# Altium PCB XC7AXXXT.PcbDoc (part 2 of 2)
Units mil, origin at the board's own origin, x right, y up, seen from the top; angles counter-clockwise.
Board outline 2381.89 x 2066.93 mil, 4 copper layers (Top Layer, SIG1, SIG2, Bottom Layer); 188 components, 308 nets, 1233 pads, 145 vias.
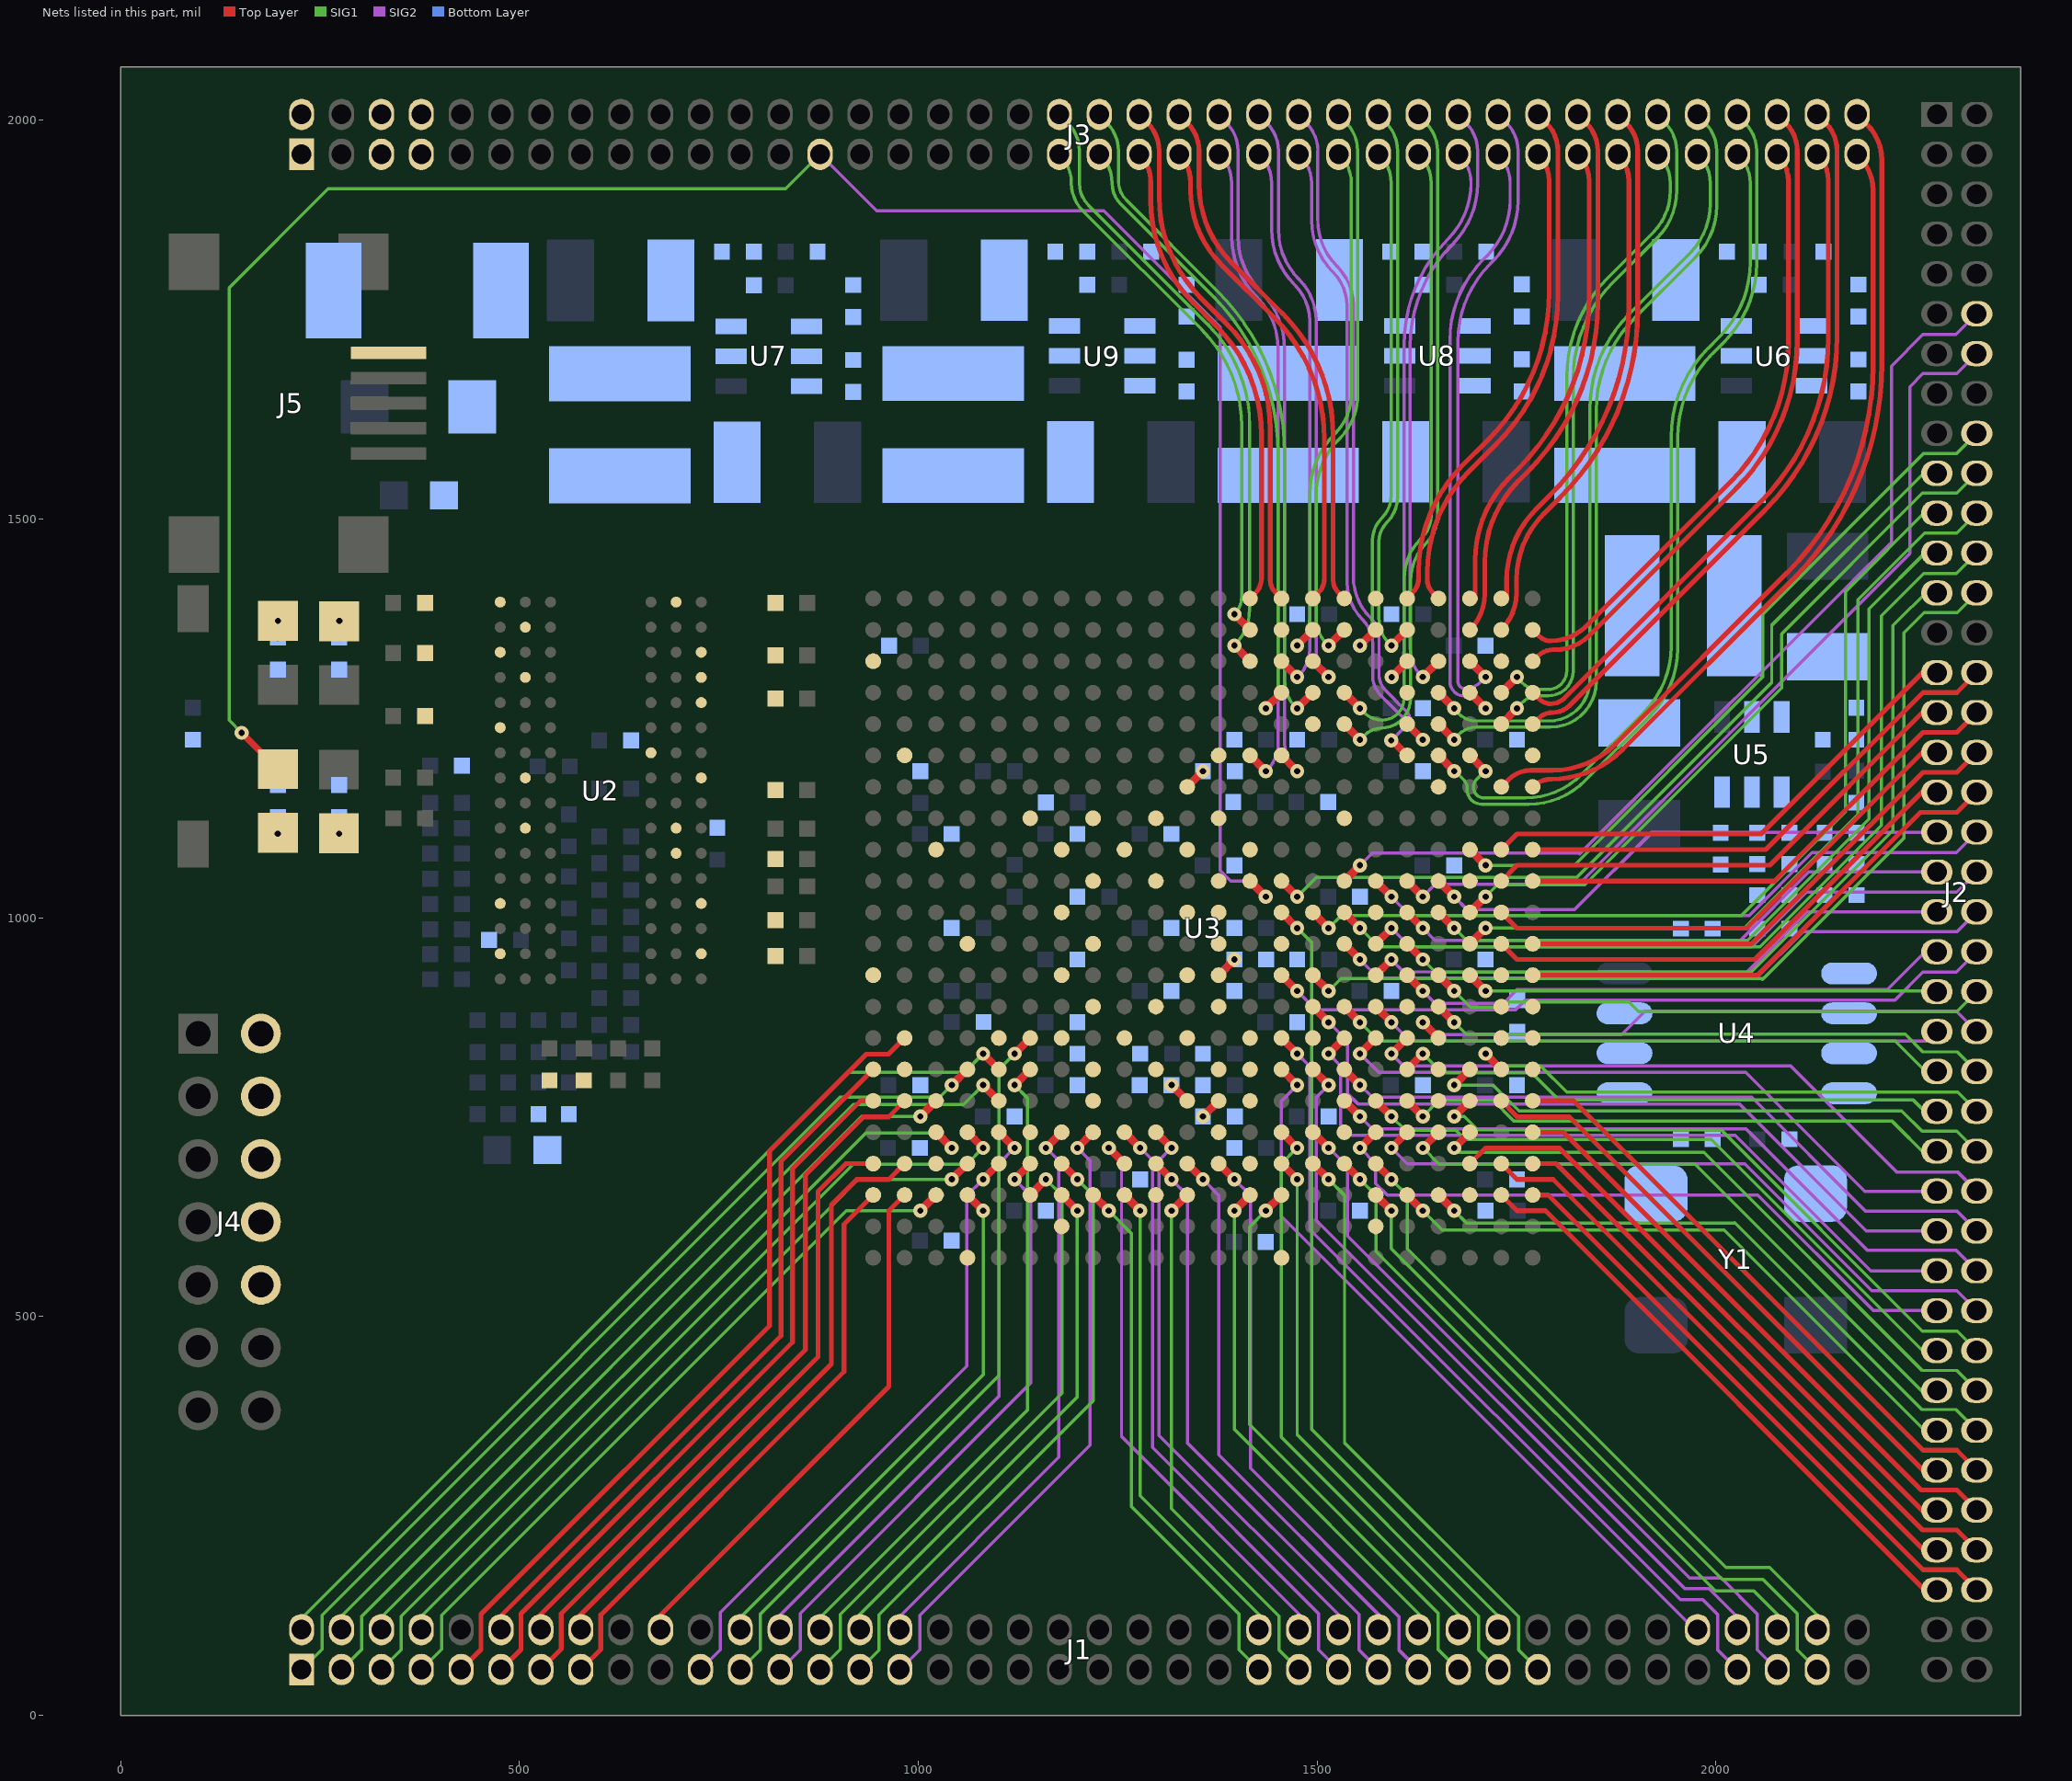
[diagram p4: the nets of this part, all layers, seen from the top]

## Via types
v1: diameter 17.72, hole 7.87, Top Layer to Bottom Layer, tented both sides, 145 vias

## Nets (pads, with @x,y where several pads share a name; then routed paths per layer and width w, separated by ;. In a path a pad name is that pad's centre, name@x,y a point inside that pad or via, vN(x,y) a via of type N, cw(c..) or ccw(c..) an arc to the next point about the centre after c; other vN are vias at no path point) (continued)
J20: J2.18 U3.J20 | length 913.9
  Top Layer w10: U3.J20@1691.5,1085.59 v1(1711.19,1065.9)
  SIG1 w4: v1(1711.19,1065.9) 1822.29,1065.9 2058.39,1302 2058.39,1380.5 2259.89,1582 2301.39,1582 J2.18@2326.89,1607.5
J21: J2.29 U3.J21 | length 630.9
  Top Layer w6: U3.J21@1730.87,1085.59 1750.65,1105.37 2056.76,1105.37 J2.29@2266.64,1315.25
J22: J2.30 U3.J22 | length 648.6
  Top Layer w6: U3.J22@1770.24,1085.59 2062.48,1085.59 2259.39,1282.5 2301.89,1282.5 J2.30@2326.89,1307.5
K13: J3.27 U3.K13 V1.2 | length 2810.3
  Top Layer w8: v1(151.69,1232) V1.2@197.19,1186.5
  Top Layer w10: U3.K13@1415.91,1046.22 v1(1435.6,1026.53)
  SIG2 w4: J3.27@876.89,1957.5 947.79,1886.6 1232.4,1886.6 1378.39,1740.61 1378.39,1059.5 1391.89,1046 1416.13,1046 v1(1435.6,1026.53)
  SIG1 w4: v1(151.69,1232) 136,1247.69 136,1790.1 260.1,1914.2 833.59,1914.2 J3.27@876.89,1957.5
K14: J2.19 U3.K14 | length 1084.9
  Top Layer w10: U3.K14@1455.28,1046.22 v1(1474.97,1026.53)
  SIG1 w4: v1(1474.97,1026.53) 1498.93,1050.5 1825.39,1050.5 2069.89,1295 2069.89,1367 J2.19@2267.14,1564.25
K16: J2.12 U3.K16 | length 1217.4
  Top Layer w10: U3.K16@1534.02,1046.22 v1(1553.71,1065.91)
  SIG2 w4: v1(1553.71,1065.91) 1569.21,1081.41 1829.3,1081.41 ; 1829.3,1080.41 2219.89,1471 2219.89,1692 2259.39,1731.5 2300.89,1731.5 J2.12@2326.89,1757.5
K17: J2.38 U3.K17 | length 815
  Top Layer w10: U3.K17@1573.39,1046.22 v1(1593.08,1026.53)
  SIG2 w4: v1(1593.08,1026.53) 1616.94,1002.67 2041.17,1002.67 2120.5,1082 2301.39,1082 J2.38@2326.89,1107.5
K18: J2.14 U3.K18 | length 1126.8
  Top Layer w10: U3.K18@1612.76,1046.22 v1(1632.45,1026.53)
  SIG2 w4: v1(1632.45,1026.53) 1647.95,1042.04 1828.04,1042.04 2242.89,1456.89 2242.89,1666 2259.39,1682.5 2301.89,1682.5 J2.14@2326.89,1707.5
K19: J2.37 U3.K19 | length 679.4
  Top Layer w10: U3.K19@1652.13,1046.22 v1(1671.82,1026.53)
  SIG2 w4: v1(1671.82,1026.53) 1687.68,1010.67 1823.06,1010.67 1919.39,1107 ; 1919.39,1107.5 J2.37@2276.89,1107.5
K21: J2.31 U3.K21 | length 628.3
  Top Layer w6: U3.K21@1730.87,1046.22 1750.65,1066 2067.39,1066 J2.31@2267.89,1266.5
K22: J2.32 U3.K22 | length 644.2
  Top Layer w6: U3.K22@1770.24,1046.22 2073.11,1046.22 2259.39,1232.5 2301.89,1232.5 J2.32@2326.89,1257.5
L1_N: J3.48 U3.F14 | length 879
  Top Layer w10: U3.F14@1455.28,1203.7 v1(1474.97,1184.01)
  SIG2 w4: J3.48@1376.89,2007.5 J3.48@1387.07,1997.32 ; J3.48@1386.07,1997.32 cw(c1350.31,1961.55) 1400.89,1961.55 1400.89,1853.94 ccw(c1497.3,1853.94) 1429.13,1785.76 cw(c1356.33,1712.97) 1459.28,1712.97 1459.28,1219.47 ccw(c1509.42,1219.47) v1@1473.97,1184.01
L1_P: J3.47 U3.F13 | length 824.9
  Top Layer w10: U3.F13@1415.91,1203.7 v1(1435.6,1184.01)
  SIG2 w4: J3.47@1377.89,1957.5 cw(c1341.68,1921.29) 1392.89,1921.29 1392.89,1853.97 ccw(c1499.38,1853.97) 1424.08,1778.67 cw(c1358.41,1713) 1451.28,1713 1451.28,1219.47 cw(c1401.14,1219.47) v1@1436.6,1184.01
L3_N: J3.50 U3.C15 | length 758
  Top Layer w10: U3.C15@1494.65,1321.81 v1(1514.34,1302.12)
  SIG2 w4: J3.50@1426.89,2007.5 J3.50@1437.07,1997.32 ; J3.50@1436.58,1997.31 cw(c1400.81,1961.55) 1451.39,1961.55 1451.39,1863.24 ccw(c1540.09,1863.24) 1477.37,1800.52 cw(c1426,1749.14) 1498.65,1749.14 1498.65,1337.58 ccw(c1548.79,1337.58) v1@1513.34,1302.12
L3_P: J3.49 U3.C14 | length 703.9
  Top Layer w10: U3.C14@1455.28,1321.81 v1(1474.97,1302.12)
  SIG2 w4: J3.49@1427.89,1957.5 cw(c1391.68,1921.29) 1442.89,1921.29 1442.89,1863.61 ccw(c1541.28,1863.61) 1471.71,1794.04 cw(c1425.98,1748.31) 1490.65,1748.31 1490.65,1337.58 cw(c1440.51,1337.58) v1@1475.97,1302.12
L5_N: J3.57 U3.D16 | length 798
  Top Layer w10: U3.D16@1534.02,1282.44 v1(1553.71,1262.75)
  SIG1 w4: v1(1553.71,1262.75) 1559.58,1256.88 ccw(c1580.86,1278.17) 1580.86,1248.07 ; 1581.86,1248.07 ccw(c1581.86,1275.1) 1608.89,1275.1 1608.89,1425 cw(c1679.24,1425) 1629.5,1474.75 1631.28,1476.53 ccw(c1603.23,1504.57) 1642.89,1504.57 1642.89,1921.29 ccw(c1591.68,1921.29) J3.57@1627.89,1957.5
L5_P: J3.58 U3.E16 | length 867.8
  Top Layer w10: U3.E16@1534.02,1243.07 v1(1553.71,1223.38)
  SIG1 w4: v1(1553.71,1223.38) 1559.25,1228.93 cw(c1581.32,1206.87) 1581.32,1238.07 ; 1580.32,1238.07 ccw(c1580.32,1274.64) 1616.89,1274.64 1616.89,1421.89 cw(c1684.75,1421.89) 1636.77,1469.88 ccw(c1602.67,1503.97) 1650.89,1503.97 1650.89,1961.55 ccw(c1600.31,1961.55) J3.58@1636.07,1997.32 ; J3.58@1626.89,2007.5 J3.58@1637.07,1997.32
L6_N: J3.42 U3.D15 | length 857.2
  Top Layer w10: v1(1474.96,1262.75) U3.D15@1494.65,1282.44
  SIG1 w4: J3.42@1226.89,2007.5 J3.42@1237.07,1997.32 ; J3.42@1236.07,1997.32 cw(c1200.31,1961.55) 1250.89,1961.55 1250.89,1923.83 ccw(c1284.29,1923.83) 1260.67,1900.22 1375.03,1785.86 cw(c1171.64,1582.47) 1459.28,1582.47 1459.28,1298.21 ccw(c1509.42,1298.21) v1@1473.96,1262.75
L6_P: J3.41 U3.D14 | length 803.2
  Top Layer w10: v1(1435.59,1262.75) U3.D14@1455.28,1282.44
  SIG1 w4: J3.41@1227.89,1957.5 cw(c1191.68,1921.29) 1242.89,1921.29 ccw(c1280.14,1921.29) 1253.8,1894.95 1369.44,1779.31 cw(c1171.85,1581.73) 1451.28,1581.73 1451.28,1298.21 cw(c1401.14,1298.21) v1@1436.59,1262.75
L7_N: J3.54 U3.B16 | length 719.9
  Top Layer w10: v1(1514.33,1341.49) U3.B16@1534.02,1361.18
  SIG1 w4: v1@1513.33,1341.49 cw(c1548.79,1376.95) 1498.65,1376.95 1498.65,1530.09 cw(c1598.65,1530.09) 1527.94,1600.8 ; J3.54@1526.89,2007.5 J3.54@1537.07,1997.32 ; 1528.04,1600.8 ccw(c1472.63,1656.21) 1550.99,1656.21 1550.99,1961.55 ; J3.54@1536.07,1997.32 cw(c1500.31,1961.55) 1550.89,1961.55
L7_P: J3.53 U3.B15 | length 665.9
  Top Layer w10: v1(1474.96,1341.49) U3.B15@1494.65,1361.18
  SIG1 w4: v1@1475.96,1341.49 ccw(c1440.51,1376.95) 1490.65,1376.95 1490.65,1531 cw(c1598.44,1531) 1522.22,1607.22 1523.46,1608.46 ccw(c1476.56,1655.37) 1542.89,1655.37 1542.89,1921.29 ccw(c1491.68,1921.29) J3.53@1527.89,1957.5
L8_N: J3.39 U3.B13 | length 690
  Top Layer w10: v1(1396.22,1380.87) U3.B13@1415.91,1361.18
  SIG1 w4: J3.39@1176.89,1957.5 cw(c1140.68,1921.29) 1191.89,1921.29 ccw(c1240.87,1921.29) 1206.23,1886.66 1355.16,1737.73 cw(c1233.49,1616.06) 1405.56,1616.06 1405.56,1403.4 cw(c1373.69,1403.4) v1(1396.22,1380.87)
L8_P: J3.40 U3.C13 | length 786.2
  Top Layer w10: v1(1396.22,1341.5) U3.C13@1415.91,1321.81
  SIG1 w4: J3.40@1176.89,2007.5 1187.07,1997.32 cw(c1151.31,1961.55) 1201.89,1961.55 1201.89,1921.09 ccw(c1240.38,1921.09) 1213.16,1893.87 1362.49,1744.54 cw(c1234.38,1616.43) 1415.56,1616.43 1415.56,1388.17 cw(c1349.55,1388.17) v1(1396.22,1341.5)
L9_N: J3.46 U3.A16 | length 674.1
  Top Layer w6: J3.46@1326.89,2007.5 1337.07,1997.32 cw(c1301.31,1961.55) 1351.89,1961.55 1351.89,1920.26 ccw(c1491.2,1920.26) 1392.69,1821.75 1456.3,1758.15 ; 1456.41,1758.03 cw(c1302.31,1604.16) 1520.08,1604.16 1520.08,1423.2 ccw(c1541.1,1423.2) 1526.24,1408.33 U3.A16@1534.02,1400.55
L9_P: J3.45 U3.A15 | length 620.1
  Top Layer w6: J3.45@1326.89,1957.5 cw(c1291.88,1922.49) 1341.39,1922.49 1341.39,1912.93 ccw(c1475.22,1912.93) 1380.59,1818.3 1445.86,1753.03 cw(c1293.23,1600.4) 1509.08,1600.4 1509.08,1426.2 cw(c1482,1426.2) 1501.15,1407.05 U3.A15@1494.65,1400.55
L10_N: J3.44 U3.A14 | length 661.9
  Top Layer w6: J3.44@1276.89,2007.5 1287.07,1997.32 cw(c1251.31,1961.55) 1301.89,1961.55 1301.89,1904.04 ccw(c1481.7,1904.04) 1354.56,1776.89 1386.23,1745.22 cw(c1253.17,1612.16) 1441.34,1612.16 1441.34,1423.2 ccw(c1462.36,1423.2) 1447.5,1408.33 U3.A14@1455.28,1400.55
L10_P: J3.43 U3.A13 | length 607.1
  Top Layer w6: J3.43@1276.89,1957.5 cw(c1241.88,1922.49) 1291.39,1922.49 1291.39,1899.61 ccw(c1472.73,1899.61) 1344.5,1771.39 1373.7,1742.19 cw(c1236.94,1605.44) 1430.34,1605.44 1430.34,1426.2 cw(c1403.26,1426.2) 1422.41,1407.05 U3.A13@1415.91,1400.55
L11_N: J3.56 U3.B18 | length 712.2
  Top Layer w10: v1(1593.07,1341.49) U3.B18@1612.76,1361.18
  SIG1 w4: J3.56@1576.89,2007.5 J3.56@1587.07,1997.32 ; J3.56@1586.07,1997.32 cw(c1550.31,1961.55) 1600.89,1961.55 1600.89,1528.72 cw(c1553.28,1528.72) 1586.94,1495.06 ccw(c1610.01,1471.99) 1577.39,1471.99 1577.39,1458 1577.39,1376.95 ccw(c1627.53,1376.95) v1@1592.07,1341.49
L11_P: J3.55 U3.B17 | length 658.1
  Top Layer w10: v1(1553.7,1341.49) U3.B17@1573.39,1361.18
  SIG1 w4: v1@1554.7,1341.49 ccw(c1519.25,1376.95) 1569.39,1376.95 1569.39,1465 1569.39,1473.4 cw(c1608.6,1473.4) 1580.87,1501.13 ccw(c1551.87,1530.14) 1592.89,1530.14 1592.89,1921.29 ccw(c1541.68,1921.29) J3.55@1577.89,1957.5
L13_N: J3.60 U3.C19 | length 768
  Top Layer w10: v1(1632.44,1302.12) U3.C19@1652.13,1321.81
  SIG2 w4: v1@1631.44,1302 cw(c1666.9,1337.45) 1616.76,1337.45 1616.76,1716.98 cw(c1797.57,1716.98) 1669.72,1844.83 ccw(c1593.93,1920.61) 1701.11,1920.61 1701.11,1961.55 ccw(c1650.53,1961.55) J3.60@1686.29,1997.32 ; J3.60@1676.89,2007.5 J3.60@1687.07,1997.32
L13_P: J3.59 U3.C18 | length 714.3
  Top Layer w10: v1(1593.39,1302) 1593.2,1302 1593.07,1302.12 U3.C18@1612.76,1321.81
  SIG2 w4: v1@1593.2,1302.19 v1(1593.39,1302) ; v1@1594.39,1302 ccw(c1559.7,1336.69) 1608.76,1336.69 1608.76,1718.18 cw(c1796.66,1718.18) 1663.8,1851.05 ccw(c1593.56,1921.29) 1692.89,1921.29 ccw(c1641.68,1921.29) J3.59@1677.89,1957.5
L14: J1.62 U3.L14 | length 1005.7
  Top Layer w10: U3.L14@1455.28,1006.85 v1(1474.97,987.16)
  SIG1 w4: v1(1474.97,987.16) 1493.39,968.74 1493.39,358.5 J1.62@1734.89,117
L14_N: J3.71 U3.D19 | length 946.7
  Top Layer w10: U3.D19@1652.13,1282.44 v1(1671.82,1262.75)
  SIG1 w4: v1@1671.82,1261.75 1677.69,1255.88 ccw(c1698.97,1277.17) 1698.97,1247.07 1790.98,1247.07 ccw(c1790.98,1297.98) 1841.89,1297.98 1841.89,1637.86 cw(c2011.23,1637.86) 1891.49,1757.6 1966.86,1832.97 ccw(c1904.01,1895.82) 1992.89,1895.82 1992.89,1921.29 ccw(c1941.68,1921.29) J3.71@1977.89,1957.5
L14_P: J3.72 U3.E19 | length 1014.2
  Top Layer w10: U3.E19@1652.13,1243.07 v1(1671.82,1223.38)
  SIG1 w4: v1@1671.82,1224.38 1677.36,1229.93 cw(c1699.43,1207.87) 1699.43,1239.07 1792.54,1239.07 ccw(c1792.54,1296.42) 1849.89,1296.42 1849.89,1636.6 cw(c2012.27,1636.6) 1897.45,1751.42 1973.69,1827.65 ccw(c1908.01,1893.33) 2000.89,1893.33 2000.89,1961.55 ccw(c1950.31,1961.55) J3.72@1986.07,1997.32 ; J3.72@1976.89,2007.5 J3.72@1987.07,1997.32
L15: J2.21 U3.L15 | length 1162.3
  Top Layer w10: U3.L15@1494.65,1006.85 v1(1514.34,987.16)
  SIG1 w4: v1(1514.34,987.16) 1529.84,1002.67 2031.67,1002.67 2162.39,1133.39 2162.39,1409 J2.21@2268.64,1515.25
L15_N: J3.52 U3.E18 | length 860.1
  Top Layer w10: U3.E18@1612.76,1243.07 v1(1632.45,1223.38)
  SIG2 w4: J3.52@1476.89,2007.5 J3.52@1487.07,1997.32 ; J3.52@1486.07,1997.32 cw(c1450.31,1961.55) 1500.89,1961.55 1500.89,1875.22 ccw(c1583.51,1875.22) 1525.09,1816.8 cw(c1476.08,1767.79) 1545.39,1767.79 1545.39,1427.58 ccw(c1616.8,1427.58) 1566.31,1377.08 cw(c1539.1,1349.88) 1577.57,1349.88 1577.57,1304.81 ccw(c1604.97,1304.81) 1585.6,1285.43 1610.8,1260.24 cw(c1594.13,1243.57) 1617.7,1243.57 ccw(c1633.25,1243.57) 1622.25,1232.58 v1@1631.44,1223.39
L15_P: J3.51 U3.F18 | length 808.9
  Top Layer w10: v1(1592.89,1222.5) 1592.89,1223.2 1593.07,1223.39 U3.F18@1612.76,1203.7
  SIG2 w4: J3.51@1477.89,1957.5 cw(c1441.68,1921.29) 1492.89,1921.29 1492.89,1874.75 ccw(c1584.38,1874.75) 1519.69,1810.06 cw(c1476.94,1767.32) 1537.39,1767.32 1537.39,1420.71 ccw(c1602.21,1420.71) 1556.37,1374.87 cw(c1524.51,1343.01) 1569.57,1343.01 1569.57,1303.77 ccw(c1604.47,1303.77) 1579.79,1279.09 1605.19,1253.7 cw(c1594.29,1242.81) 1609.7,1242.81 cw(c1600.52,1242.81) 1607.01,1236.32 v1@1593.89,1223.2 ; v1(1592.89,1222.5) v1@1592.89,1223.2
L16: J2.24 U3.L16 | length 1169.4
  Top Layer w10: U3.L16@1534.02,1006.85 v1(1553.71,987.16)
  SIG1 w4: v1(1553.71,987.16) 1577.2,963.67 2055.06,963.67 2207.39,1116 2207.39,1379 2260.39,1432 2301.39,1432 J2.24@2326.89,1457.5
L16_N: J3.65 U3.A20 | length 601.7
  Top Layer w6: U3.A20@1698.11,1399.16 1698.11,1448.24 cw(c1845.33,1448.24) 1741.23,1552.34 1751.4,1562.51 ccw(c1535.35,1778.56) 1840.89,1778.56 1840.89,1923.7 ccw(c1793.09,1923.7) J3.65@1826.89,1957.5
L16_P: J3.66 U3.B20 | length 753.9
  Top Layer w6: 1710.11,1411 1710.11,1406.11 ; J3.66@1826.89,2007.5 1837.07,1997.32 cw(c1801.31,1961.55) 1851.89,1961.55 1851.89,1771.65 cw(c1552.02,1771.65) 1764.06,1559.62 1752.52,1548.07 ccw(c1854.89,1445.7) 1710.11,1445.7 1710.11,1406.11 ; 1710.11,1406.11 cw(c1646.57,1406.11) U3.B20@1691.5,1361.18 ccw(c1646.57,1406.11) 1710.11,1406.11
L17_N: J3.64 U3.A19 | length 668.8
  Top Layer w6: U3.A19@1652.13,1400.55 1644.35,1408.33 cw(c1659.21,1423.2) 1638.19,1423.2 1638.19,1433.79 cw(c1816.73,1433.79) 1690.48,1560.04 1724.69,1594.24 ccw(c1538.3,1780.63) 1801.89,1780.63 1801.89,1961.55 ccw(c1751.31,1961.55) 1787.07,1997.32 J3.64@1776.89,2007.5
L17_P: J3.63 U3.A18 | length 614
  Top Layer w6: U3.A18@1612.76,1400.55 1619.26,1407.05 ccw(c1600.11,1426.2) 1627.19,1426.2 1627.19,1434.66 cw(c1814.63,1434.66) 1682.09,1567.2 1714.18,1599.29 ccw(c1528.99,1784.48) 1790.89,1784.48 1790.89,1923.7 ccw(c1743.09,1923.7) J3.63@1776.89,1957.5
L18: J2.39 U3.L18 | length 714.1
  Top Layer w10: U3.L18@1612.76,1006.85 v1(1632.45,987.16)
  SIG2 w4: v1(1632.45,987.16) 1647.81,971.8 2030.69,971.8 2116.39,1057.5 J2.39@2276.89,1057.5
L18_N: J3.73 U3.F20 | length 1056.2
  Top Layer w10: U3.F20@1691.5,1203.7 v1(1711.19,1184.01)
  SIG1 w4: v1@1710.19,1184.01 1700.39,1174.22 ccw(c1711,1163.62) 1696,1163.62 ccw(c1709.12,1163.62) 1709.12,1150.5 1761,1150.5 ccw(c1761,1250.5) 1831.71,1179.79 1909.77,1257.85 ; 1909.68,1257.85 ccw(c1827.09,1340.43) 1943.89,1340.43 1943.89,1602.98 cw(c2100.94,1602.98) 1989.89,1714.03 2003.93,1728.07 ccw(c1909.87,1822.13) 2042.89,1822.13 2042.89,1921.29 ccw(c1991.68,1921.29) J3.73@2027.89,1957.5
L18_P: J3.74 U3.F19 | length 1138.2
  Top Layer w10: U3.F19@1652.13,1203.7 v1(1671.82,1184.01)
  SIG1 w4: v1@1672.82,1184.01 1683.92,1172.92 cw(c1674.05,1163.05) 1688,1163.05 1688,1160.66 ccw(c1706.16,1160.66) 1706.16,1142.5 1765,1142.5 ccw(c1765,1242.5) 1835.71,1171.79 1916.65,1252.72 ccw(c1831.52,1337.85) 1951.91,1337.85 1951.89,1601.95 cw(c2101.43,1601.95) 1995.69,1707.69 2009.89,1721.89 ccw(c1910.9,1820.88) 2050.89,1820.88 2050.89,1961.55 ccw(c2000.31,1961.55) J3.74@2036.07,1997.32 ; J3.74@2026.89,2007.5 J3.74@2037.07,1997.32
L19: J2.23 U3.L19 | length 988.1
  Top Layer w10: U3.L19@1652.13,1006.85 v1(1671.82,987.16)
  SIG1 w4: v1(1671.82,987.16) 1687.31,971.67 2039.67,971.67 2191.89,1123.89 2191.89,1387.5 J2.23@2267.64,1463.25
L19_N: J3.62 U3.C20 | length 812.5
  Top Layer w10: U3.C20@1691.5,1321.81 v1(1711.19,1302.12)
  SIG2 w4: v1(1711.19,1302.12) 1704.36,1295.3 cw(c1685.53,1314.13) 1685.53,1287.5 cw(c1685.53,1296.64) 1676.39,1296.64 1676.39,1722.2 cw(c1814.72,1722.2) 1716.91,1820.02 1720.54,1823.65 ccw(c1644.87,1899.33) 1751.89,1899.33 1751.89,1961.55 ccw(c1701.31,1961.55) 1737.07,1997.32 J3.62@1726.89,2007.5
L19_P: J3.61 U3.D20 | length 774.1
  Top Layer w10: U3.D20@1691.5,1282.44 v1(1711.19,1262.75)
  SIG2 w4: v1(1711.19,1262.75) 1703.59,1270.35 ccw(c1685.12,1251.87) 1685.12,1278 cw(c1685.12,1296.73) 1666.39,1296.73 1666.39,1723.82 cw(c1810.81,1723.82) 1708.69,1825.94 1713.06,1830.31 ccw(c1643.45,1899.92) 1741.89,1899.92 1741.89,1921.29 ccw(c1690.68,1921.29) J3.61@1726.89,1957.5
L20: J2.20 U3.L20 | length 903
  Top Layer w10: U3.L20@1691.5,1006.85 v1(1711.19,1026.54)
  SIG1 w4: v1(1711.19,1026.54) 1726.15,1041.5 1835.39,1041.5 2082.39,1288.5 2082.39,1356 2258.89,1532.5 2301.89,1532.5 J2.20@2326.89,1557.5
L20_N: J3.75 U3.B22 | length 815.6
  Top Layer w6: U3.B22@1770.24,1361.18 1778.02,1353.4 ccw(c1792.89,1368.26) 1792.89,1347.24 ; J3.75@2076.89,1957.5 cw(c2043.09,1923.7) 2090.89,1923.7 2090.89,1722.13 cw(c1842.99,1722.13) 2018.28,1546.84 1836.92,1365.48 ; 1792.89,1347.24 ccw(c1792.89,1409.51) 1836.92,1365.48 ; 1792.89,1347.24 ccw(c1792.89,1409.51) 1836.92,1365.48
L20_P: J3.76 U3.C22 | length 838.7
  Top Layer w6: U3.C22@1770.24,1321.81 1776.74,1328.31 cw(c1795.89,1309.16) 1795.89,1336.24 1798.55,1336.24 ccw(c1798.55,1395.85) 1840.7,1353.7 2024.56,1537.56 ccw(c1837.85,1724.26) 2101.89,1724.26 2101.89,1961.55 ccw(c2051.31,1961.55) 2087.07,1997.32 J3.76@2076.89,2007.5
L21: J2.33 U3.L21 | length 637.1
  Top Layer w6: U3.L21@1730.87,1006.85 1750.65,987.07 2038.46,987.07 J2.33@2265.64,1214.25
L21_N: J3.67 U3.A21 | length 605.7
  Top Layer w6: U3.A21@1737.48,1399.16 1737.48,1423.07 cw(c1864.28,1423.07) 1774.62,1512.73 1792.17,1530.28 ccw(c1553.83,1768.62) 1890.89,1768.62 1890.89,1923.7 ccw(c1843.09,1923.7) J3.67@1876.89,1957.5
L21_P: J3.68 U3.B21 | length 703.3
  Top Layer w6: U3.B21@1730.87,1361.18 ccw(c1684.73,1407.32) 1749.98,1407.32 1749.98,1424.36 cw(c1866.29,1424.36) 1784.05,1506.6 1804.81,1527.36 ccw(c1570.43,1761.74) 1901.89,1761.74 1901.89,1961.55 ccw(c1851.31,1961.55) 1887.07,1997.32 J3.68@1876.89,2007.5
L22_N: J3.77 U3.D22 | length 855.6
  Top Layer w6: U3.D22@1770.24,1282.44 1778.02,1274.66 ccw(c1792.89,1289.52) 1792.89,1268.5 ccw(c1792.89,1292.51) 1809.86,1275.53 2055.51,1521.17 ccw(c1849.37,1727.31) 2140.89,1727.31 2140.89,1924.91 ccw(c2096.01,1924.91) J3.77@2127.74,1956.65
L22_P: J3.78 U3.E22 | length 928.4
  Top Layer w6: U3.E22@1770.24,1243.07 1776.74,1249.57 cw(c1795.89,1230.42) 1795.89,1257.5 ccw(c1795.89,1285.26) 1815.52,1265.63 2061.72,1511.83 ccw(c1844.04,1729.52) 2151.89,1729.52 2151.89,1961.55 ccw(c2101.31,1961.55) 2137.07,1997.32 J3.78@2126.89,2007.5
L23_N: J3.69 U3.D21 | length 803
  Top Layer w10: U3.D21@1730.87,1282.44 v1(1750.56,1302.13)
  SIG1 w4: v1@1750.56,1301.13 1756.43,1295.26 ccw(c1777.71,1316.54) 1777.71,1286.44 1789.5,1286.44 ccw(c1789.5,1309.83) 1812.89,1309.83 1812.89,1678 cw(c1989.2,1678) 1864.53,1802.67 1920.87,1859.02 ; 1920.77,1859.02 ccw(c1867.62,1912.17) 1942.79,1912.17 1942.79,1921.29 ccw(c1891.58,1921.29) J3.69@1927.79,1957.5
L23_P: J3.70 U3.E21 | length 870.5
  Top Layer w10: U3.E21@1730.87,1243.07 v1(1750.56,1262.76)
  SIG1 w4: v1@1750.56,1263.76 1756.1,1269.3 cw(c1778.17,1247.24) 1778.17,1278.44 1789.82,1278.44 ccw(c1789.82,1309.51) 1820.89,1309.51 ; 1820.89,1308.51 1820.89,1675.57 cw(c1993.08,1675.57) 1871.32,1797.32 1925.82,1851.82 ccw(c1865.22,1912.26) 1950.81,1912.26 1950.81,1961.47 ccw(c1900.23,1961.47) J3.70@1936,1997.24 ; J3.70@1926.89,2007.5 J3.70@1937.07,1997.32
L24_N: J3.80 U3.G22 | length 1046.9
  Top Layer w6: U3.G22@1770.24,1164.33 cw(c1793.59,1140.98) 1793.59,1174 ccw(c1793.59,1300.27) 1882.87,1210.98 2095.75,1423.86 ccw(c1825.03,1694.59) 2207.89,1694.59 2207.89,1950 ccw(c2143.91,1950) J3.80@2189.15,1995.24 ; J3.80@2176.89,2007.5 J3.80@2187.07,1997.32
L24_P: J3.79 U3.G21 | length 1019.3
  Top Layer w6: U3.G21@1730.87,1164.33 1739.98,1173.44 cw(c1767.89,1145.53) 1767.89,1185 1794.86,1185 ccw(c1794.86,1297.19) 1874.19,1217.86 2089.45,1433.12 ccw(c1830.08,1692.5) 2196.89,1692.5 2196.89,1912 ccw(c2135.33,1912) J3.79@2178.86,1955.53
M16: J2.42 U3.M16 | length 845.2
  Top Layer w10: U3.M16@1534.02,967.48 v1(1553.71,947.79)
  SIG2 w4: v1(1553.71,947.79) 1577.21,924.29 2050.68,924.29 2108.89,982.5 2301.89,982.5 J2.42@2326.89,1007.5
M17: J2.40 U3.M17 | length 810.1
  Top Layer w10: U3.M17@1573.39,967.48 v1(1593.08,987.17)
  SIG2 w4: v1(1593.08,987.17) 1616.45,963.8 2044.8,963.8 2113.5,1032.5 2301.89,1032.5 J2.40@2326.89,1057.5
M18: J2.25 U3.M18 | length 1020.9
  Top Layer w10: U3.M18@1612.76,967.48 v1(1632.45,947.79)
  SIG1 w4: v1(1632.45,947.79) 1648.32,931.92 2044.31,931.92 2221.89,1109.5 2221.89,1366.5 J2.25@2268.89,1413.5
M20: J2.22 U3.M20 | length 1016.9
  Top Layer w10: U3.M20@1691.5,967.48 v1(1711.19,987.17)
  SIG1 w4: v1(1711.19,987.17) 2035.56,987.17 2177.89,1129.5 2177.89,1399 2261.39,1482.5 2301.89,1482.5 J2.22@2326.89,1507.5
M21: J2.35 U3.M21 | length 634.3
  Top Layer w6: U3.M21@1730.87,967.48 1750.65,947.7 2048.59,947.7 J2.35@2266.64,1165.75
M22: J2.34 U3.M22 | length 656.1
  Top Layer w6: U3.M22@1770.24,967.48 2044.37,967.48 2259.39,1182.5 2301.89,1182.5 J2.34@2326.89,1207.5
N14: J2.44 U3.N14 | length 919.6
  Top Layer w10: U3.N14@1455.28,928.11 v1(1474.97,908.42)
  SIG2 w4: v1(1474.97,908.42) 1498.47,884.92 1748.81,884.92 1760.89,897 2224.39,897 2259.39,932 2301.39,932 J2.44@2326.89,957.5
N15: J2.26 U3.N15 | length 1198.4
  Top Layer w10: U3.N15@1494.65,928.11 v1(1514.34,908.42)
  SIG1 w4: v1(1514.34,908.42) 1529.84,923.92 2058.31,923.92 ; 2058.31,922.92 2235.39,1100 2235.39,1357.5 2260.89,1383 2302.39,1383 J2.26@2326.89,1407.5
N17: J2.41 U3.N17 | length 749.2
  Top Layer w10: U3.N17@1573.39,928.11 v1(1593.08,947.8)
  SIG2 w4: v1(1593.08,947.8) 1608.58,932.29 2039.29,932.29 2114.5,1007.5 J2.41@2276.89,1007.5
N18: J2.43 U3.N18 | length 699.4
  Top Layer w10: U3.N18@1612.76,928.11 v1(1632.45,908.42)
  SIG2 w4: v1(1632.45,908.42) 1647.95,892.92 1733.42,892.92 1750.5,910 2214.89,910 J2.43@2268.39,963.5
N19: J2.46 U3.N19 | length 709.1
  Top Layer w10: U3.N19@1652.13,928.11 v1(1671.82,908.42)
  SIG1 w4: v1(1671.82,908.42) 1691.83,888.41 1733.8,888.41 1739.89,894.5 1890.89,894.5 1902.89,882.5 2301.89,882.5 J2.46@2326.89,907.5
N20: J2.45 U3.N20 | length 593.5
  Top Layer w10: U3.N20@1691.5,928.11 v1(1711.19,908.42)
  SIG1 w4: v1(1711.19,908.42) J2.45@2276.89,908.42
N22: J2.36 U3.N22 | length 651.7
  Top Layer w6: U3.N22@1770.24,928.11 2052,928.11 2256.39,1132.5 2301.89,1132.5 J2.36@2326.89,1157.5
NetC75_1: C75.1 L1.1 U5.2
NetC75_2: C75.2 U5.6
NetC79_1: C79.1 R41.1 U5.5
NetC80_1: C80.1 U6.6
NetC80_2: C80.2 L2.1 U6.2
NetC81_1: C81.1 U7.6
NetC81_2: C81.2 L3.1 U7.2
NetC86_1: C86.1 R47.1 U6.5
NetC87_1: C87.1 R49.1 U7.5
NetC88_1: C88.1 U8.6
NetC88_2: C88.2 L4.1 U8.2
NetC89_1: C89.1 U9.6
NetC89_2: C89.2 L5.1 U9.2
NetC94_1: C94.1 R53.1 U8.5
NetC95_1: C95.1 R55.1 U9.5
NetR25_2: R25.2 U2.L8
NetR33_1: R33.1 U4.6
NetR34_1: R34.1 Y1.3
NetR35_1: R35.1 V1.1 | length 20.9
  Bottom Layer w10: v1@197.19,1105.6 R35.1@197.19,1126.5
  other v1: 197.09,1105.5
NetR37_1: R37.1 U3.U11 | length 27.8
  Top Layer w10: v1(1317.48,790.32) U3.U11@1337.17,770.63
NetR38_1: R38.1 U3.G11 | length 27.8
  Top Layer w10: U3.G11@1337.17,1164.33 v1(1356.86,1184.02)
NetR39_1: R39.1 U3.U12 | length 27.8
  Top Layer w10: v1(1356.85,750.94) U3.U12@1376.54,770.63
NetR40_1: R40.1 U3.N12 | length 27.8
  Top Layer w10: U3.N12@1376.54,928.11 v1(1396.23,947.8)
NetR42_1: R42.1 R60.2
NetR43_1: R43.1 R59.2
NetR44_1: R44.1 R61.2
NetR45_1: R45.1 V2.1 | length 20.9
  Bottom Layer w10: R45.1@197.19,1351.5 v1@197.19,1372.4
  other v1: 197.29,1372.5
NetR46_1: R46.1 R59.1 R60.1 R61.1 U5.4
NetR48_1: R48.1 R51.1 U6.4
NetR50_1: R50.1 R52.1 U7.4
NetR54_1: R54.1 R57.1 U8.4
NetR56_1: R56.1 R58.1 U9.4
NetR63_1: R63.1 V4.1 | length 20.9
  Bottom Layer w10: v1@273.9,1105.6 R63.1@273.9,1126.5
  other v1: 273.8,1105.5
NetR64_1: R64.1 V3.1 | length 20.9
  Bottom Layer w10: R64.1@273.9,1351.5 v1@273.9,1372.4
  other v1: 274,1372.5
P15: J2.57 U3.P15 | length 937.1
  Top Layer w10: U3.P15@1494.65,888.74 v1(1514.34,869.05)
  SIG2 w4: v1(1514.34,869.05) 1538,845.39 1538,779.89 1551.08,766.81 2029.08,766.81 2188.39,607.5 J2.57@2276.89,607.5
P16: J2.49 U3.P16 | length 769.4
  Top Layer w10: U3.P16@1534.02,888.74 v1(1553.71,869.05)
  SIG1 w4: v1(1553.71,869.05) 1577.26,845.5 2225.39,845.5 ; 2225.39,845 J2.49@2267.89,802.5
P17: J2.47 U3.P17 | length 721.4
  Top Layer w10: U3.P17@1573.39,888.74 v1(1593.08,869.05)
  SIG2 w4: v1(1593.08,869.05) 1616.63,845.5 J2.47@2276.89,845.5
P19: J2.50 U3.P19 | length 708.4
  Top Layer w10: U3.P19@1652.13,888.74 v1(1671.82,869.05)
  SIG1 w4: v1(1671.82,869.05) 1686.87,854 2237.39,854 2259.39,832 2302.39,832 J2.50@2326.89,807.5
R2: J1.9 U3.R2 | length 1038.3
  Top Layer w6: J1.9@426.89,57.5 451.89,82.5 451.89,127 813.39,488.5 813.39,707.5 934.89,829 962.47,829 U3.R2@982.84,849.37
R6: J1.23 U3.R6 | length 942.4
  Top Layer w10: v1(1120.63,829.68) U3.R6@1140.32,849.37
  SIG1 w4: J1.23@776.89,57.5 801.89,82.5 801.89,127 1101.39,426.5 1101.39,810.44 v1(1120.63,829.68)
R14: J1.73 U3.R14 | length 1045
  Top Layer w10: U3.R14@1455.28,849.37 v1(1474.97,829.68)
  SIG2 w4: v1(1474.97,829.68) 1491,813.65 1491,609.39 1955.39,145 1983.39,145 2001.89,126.5 2001.89,82.5 J1.73@2026.89,57.5
R16: J2.59 U3.R16 | length 946.3
  Top Layer w10: v1(1514.33,829.68) U3.R16@1534.02,849.37
  SIG2 w4: v1(1514.33,829.68) 1529.5,814.52 1529.5,740.89 1543.09,727.3 2024.09,727.3 2193.89,557.5 J2.59@2276.89,557.5
R17: J2.55 U3.R17 | length 822.6
  Top Layer w10: v1(1553.7,829.68) U3.R17@1573.39,849.37
  SIG2 w4: v1(1553.7,829.68) 1577.2,806.18 2037.21,806.18 2186.39,657 J2.55@2276.89,657
R18: J2.56 U3.R18 | length 833
  Top Layer w10: v1(1593.07,829.68) U3.R18@1612.76,849.37
  SIG2 w4: v1(1593.07,829.68) 1608.57,814.18 2093.82,814.18 2227,681 2303.39,681 J2.56@2326.89,657.5
R19: J2.48 U3.R19 | length 751.5
  Top Layer w10: v1(1632.44,869.06) U3.R19@1652.13,849.37
  SIG2 w4: v1(1632.44,869.06) 1648,853.5 1881.5,853.5 1911,883 2301.39,883 J2.48@2326.89,857.5
SPI_CLK: R33.2 U3.L12
SPI_CS: R32.2 U3.T19 U4.1
SPI_D0: U3.P22 U4.5
SPI_D1: U3.R22 U4.2
SPI_D2: R31.1 U3.P21 U4.3
SPI_D3: R30.1 U3.R21 U4.7
T1: J1.12 U3.T1 | length 888.2
  Top Layer w6: J1.12@469.89,118 827.89,476 827.89,694.42 U3.T1@943.47,810
T4: J1.1 U3.T4 | length 1171.3
  Top Layer w10: v1(1041.89,790.31) U3.T4@1061.58,810
  SIG1 w4: J1.1@226.89,57.5 252.39,83 252.39,125.5 901.89,775 1026.58,775 v1(1041.89,790.31)
T5: J1.2 U3.T5 | length 1185.6
  Top Layer w10: v1(1081.26,829.69) U3.T5@1100.95,810
  SIG1 w4: J1.2@218.89,116.5 221.5,116.5 911.1,806.1 1057.68,806.1 v1(1081.26,829.69)
T6: J1.28 U3.T6 | length 818.6
  Top Layer w10: v1(1120.63,790.31) U3.T6@1140.32,810
  SIG1 w4: J1.28@870.39,116.5 1136.64,382.75 1136.64,774.31 v1(1120.63,790.31)
T14: J1.72 U3.T14 | length 933.6
  Top Layer w10: U3.T14@1455.28,810 v1(1474.97,790.31)
  SIG2 w4: v1(1474.97,790.31) 1455,770.35 1455,625.89 J1.72@1973.39,107.5
T15: J1.74 U3.T15 | length 951
  Top Layer w10: U3.T15@1494.65,810 v1(1514.34,790.31)
  SIG2 w4: v1(1514.34,790.31) 1499,774.98 1499,620.89 1960.89,159 1991.39,159 J1.74@2036.39,114
T16: J2.58 U3.T16 | length 876.7
  Top Layer w10: U3.T16@1534.02,810 v1(1553.71,790.31)
  SIG2 w4: v1(1553.71,790.31) 1569.02,775 2044.89,775 2187.39,632.5 2301.89,632.5 J2.58@2326.89,607.5
T18: J2.51 U3.T18 | length 696.6
  Top Layer w10: U3.T18@1612.76,810 v1(1632.45,829.69)
  SIG1 w4: v1(1632.45,829.69) 1656.63,805.5 1769.39,805.5 1803.39,771.5 2247.39,771.5 J2.51@2268.39,750.5
T20: J2.54 U3.T20 | length 717.2
  Top Layer w10: v1(1671.81,790.31) U3.T20@1691.5,810
  SIG1 w4: v1(1671.81,790.31) 1720.58,790.31 1752.89,758 1771,758 2232.89,758 2258.39,732.5 2301.89,732.5 J2.54@2326.89,707.5
T21: J2.52 U3.T21 | length 673.4
  Top Layer w10: v1(1711.18,829.69) U3.T21@1730.87,810
  SIG1 w4: v1(1711.18,829.69) 1726.37,814.5 1779.89,814.5 1812.89,781.5 2302.89,781.5 J2.52@2326.89,757.5
TCK: J4.10 U3.V12
TDI: J4.12 U3.R13
TDO: J4.11 U3.U13
TMS: J4.9 U3.T13
U1: J1.11 U3.U1 | length 915.7
  Top Layer w6: J1.11@476.89,57.5 501.89,82.5 501.89,127.5 842.39,468 842.39,685.5 927.52,770.63 U3.U1@943.47,770.63
U2: J1.14 U3.U2 | length 864.3
  Top Layer w6: J1.14@517.39,117.5 858.39,458.5 858.39,677.5 931.39,750.5 962.71,750.5 U3.U2@982.84,770.63
U3: J1.3 U3.U3 | length 1065
  Top Layer w10: v1(1002.52,750.94) U3.U3@1022.21,770.63
  SIG1 w4: J1.3@276.89,57.5 301.89,82.5 301.89,124 928.83,750.94 v1(1002.52,750.94)
U5: J1.4 U3.U5 | length 1119.7
  Top Layer w10: v1(1081.26,790.32) U3.U5@1100.95,770.63
  SIG1 w4: J1.4@268.64,116.25 918.39,766 1056.95,766 v1(1081.26,790.32)
U16: J2.60 U3.U16 | length 881.2
  Top Layer w10: U3.U16@1534.02,770.63 v1(1553.71,750.94)
  SIG2 w4: v1(1553.71,750.94) 1569.35,735.3 2037.59,735.3 2189.89,583 2301.39,583 J2.60@2326.89,557.5
U17: J2.63 U3.U17 | length 827.1
  Top Layer w10: U3.U17@1573.39,770.63 v1(1593.08,750.94)
  SIG1 w4: v1(1593.08,750.94) 1610.52,733.5 1673.89,733.5 1685.39,722 1993.89,722 J2.63@2267.14,448.75
U18: J2.53 U3.U18 | length 698.6
  Top Layer w10: U3.U18@1612.76,770.63 v1(1632.45,750.94)
  SIG1 w4: v1(1632.45,750.94) 1652.5,771 1720.89,771 1746.39,745.5 2220.39,745.5 J2.53@2265.64,700.25
U20: J2.64 U3.U20 | length 804.5
  Top Layer w10: v1(1671.81,750.94) U3.U20@1691.5,770.63
  SIG1 w4: v1(1671.81,750.94) 1684.45,750.94 1701.39,734 2006.89,734 2258.89,482 2302.39,482 J2.64@2326.89,457.5
U21: J2.69 U3.U21 | length 731
  Top Layer w6: U3.U21@1730.87,770.63 1750.65,750.85 1816.04,750.85 J2.69@2266.89,300
U22: J2.70 U3.U22 | length 748.5
  Top Layer w6: U3.U22@1770.24,770.63 1821.26,770.63 2259.39,332.5 2301.89,332.5 J2.70@2326.89,307.5
V3: J1.6 U3.V3 | length 1010.1
  Top Layer w10: U3.V3@1022.21,731.26 v1(1041.9,711.57)
  SIG1 w4: J1.6@321.39,117.5 934.39,730.5 1022.97,730.5 v1(1041.9,711.57)
V4: J1.5 U3.V4 | length 1077.7
  Top Layer w10: U3.V4@1061.58,731.26 v1(1081.27,711.57)
  SIG1 w4: J1.5@326.89,57.5 351.89,82.5 351.89,124.5 918.39,691 1060.69,691 v1(1081.27,711.57)
V5: J1.26 U3.V5 | length 746.8
  Top Layer w10: U3.V5@1100.95,731.26 v1(1120.64,711.57)
  SIG2 w4: J1.26@818.64,117.75 1100.89,400 1100.89,691.83 v1(1120.64,711.57)
V7: J1.32 U3.V7 | length 715.3
  Top Layer w10: v1(1160,711.57) U3.V7@1179.69,731.26
  SIG2 w4: J1.32@968.89,116.5 1176.01,323.62 1176.01,695.57 v1(1160,711.57)
V8: J1.31 U3.V8 | length 787.3
  Top Layer w10: v1(1199.37,711.57) U3.V8@1219.06,731.26
  SIG2 w4: J1.31@976.89,57.5 1001.89,82.5 1001.89,125.5 1215.38,338.99 1215.38,695.57 v1(1199.37,711.57)
V9: J1.53 U3.V9 | length 785
  Top Layer w10: U3.V9@1258.43,731.26 v1(1278.12,711.57)
  SIG2 w4: v1(1278.12,711.57) 1293.62,696.07 1293.62,335.88 1501.89,127.61 1501.89,82.5 J1.53@1526.89,57.5
V10: J1.54 U3.V10 | length 724.7
  Top Layer w10: U3.V10@1297.8,731.26 v1(1317.49,711.57)
  SIG2 w4: v1(1317.49,711.57) 1301.89,695.98 1301.89,351.11 1535.14,117.86 J1.54@1535.14,117.75
V14: J1.60 U3.V14 | length 723.6
  Top Layer w10: U3.V14@1455.28,731.26 v1(1474.97,711.57)
  SIG1 w4: v1(1474.97,711.57) 1454.95,691.56 1454.95,348.94 J1.60@1684.64,119.25
V15: J1.75 U3.V15 | length 938.4
  Top Layer w10: U3.V15@1494.65,731.26 v1(1514.34,711.57)
  SIG2 w4: v1(1514.34,711.57) 1537.89,688.02 1537.89,601 1966.89,172 2006.89,172 2051.89,127 2051.89,82.5 J1.75@2076.89,57.5
V17: J2.61 U3.V17 | length 850.1
  Top Layer w10: v1(1553.7,711.57) U3.V17@1573.39,731.26
  SIG2 w4: v1(1553.7,711.57) 1573.45,691.83 1573.45,667.05 1588,652.5 2052.39,652.5 2197.39,507.5 J2.61@2276.89,507.5
V18: J2.62 U3.V18 | length 846.2
  Top Layer w10: v1(1593.07,711.57) U3.V18@1612.76,731.26
  SIG2 w4: v1(1593.07,711.57) 1612.82,691.83 2036.06,691.83 2195.39,532.5 2301.89,532.5 J2.62@2326.89,507.5
V19: J2.65 U3.V19 | length 793.2
  Top Layer w10: v1(1632.44,711.57) U3.V19@1652.13,731.26
  SIG1 w4: v1(1632.44,711.57) 1652.94,691.08 1973.81,691.08 J2.65@2267.64,397.25
V20: J2.66 U3.V20 | length 808.9
  Top Layer w10: v1(1671.81,711.57) U3.V20@1691.5,731.26
  SIG1 w4: v1(1671.81,711.57) 1677.39,706 1984.89,706 2258.39,432.5 2301.89,432.5 J2.66@2326.89,407.5
V22: J2.72 U3.V22 | length 752.9
  Top Layer w6: U3.V22@1770.24,731.26 1808.63,731.26 2257.39,282.5 2301.89,282.5 J2.72@2326.89,257.5
VDD1.0: C35.1 C36.1 C37.1 C38.1 C39.1 C40.1 C41.1 C42.1 C48.1 C93.1 L5.2 R56.2 U3.H8 U3.H10 U3.J7 U3.J9 U3.J11 U3.K8 U3.L7 U3.L11 U3.M8 U3.N7 U3.N11 U3.P8 U3.P10 U3.R7 U3.R9 U3.T8 U3.T10
VDD1.5: C1.1 C2.1 C3.1 C4.1 C5.1 C6.1 C7.1 C8.1 C9.1 C10.1 C11.1 C12.1 C13.1 C17.1 C20.1 C22.1 C85.1 C99.1 C100.1 C102.1 C103.1 C104.1 L3.2 R1.2 R50.2 R62.2 U2.A1 U2.A8 U2.B2 U2.C1 U2.C9 U2.D2 U2.D9 U2.E9 U2.F1 U2.G7 U2.H2 U2.H9 U2.K2 U2.K8 U2.N1 U2.N9 U2.R1 U2.R9 U3.C1 U3.F2 U3.H6 U3.J3 U3.M4 U3.N1
VDD1.8: C43.1 C44.1 C45.1 C46.1 C47.1 C92.1 L4.2 R54.2 U3.H12 U3.K10 U3.K12 U3.M12 U3.P12 U3.R11
VDD3.3: C24.1 C33.1 C34.1 C55.1 C56.1 C57.1 C58.1 C59.1 C60.1 C61.1 C62.1 C63.1 C64.1 C65.1 C66.1 C67.1 C68.1 C69.1 C70.1 C71.1 C72.1 C73.1 C74.1 C84.1 C96.1 C97.1 C98.1 J3.1 J3.2 J4.8 L2.2 R30.2 R31.2 R32.1 R35.2 R36.2 R37.2 R38.2 R39.2 R40.2 R45.2 R48.2 R63.2 R64.2 U3.AA7 U3.AA17 U3.AB4 U3.AB14 U3.F12 U3.G19 U3.H16 U3.J13 U3.K20 U3.L17 U3.M14 U3.N21 U3.P18 U3.R5 U3.R15 U3.T2 U3.T12 U3.T22 U3.U8 U3.U19 U3.V6 U3.V16 U3.W3 U3.W13 U3.Y10 U3.Y20 U4.8 Y1.4
VDD5.0: C76.1 C78.1 C82.1 C83.1 C90.1 C91.1 D1.2 F1.2 R41.2 R47.2 R49.2 R53.2 R55.2 U5.3 U6.3 U7.3 U8.3 U9.3
VDDIN: F1.1 J3.5 J3.6 J3.7 J3.8 J5.1
VDDIO: C49.1 C50.1 C51.1 C52.1 C53.1 C54.1 C77.1 L1.2 R42.2 R43.2 R44.2 U3.A17 U3.B14 U3.C21 U3.D18 U3.E15 U3.F22
W1: J1.13 U3.W1 | length 827
  Top Layer w6: J1.13@526.89,57.5 552.39,83 552.39,127.5 874.39,449.5 874.39,657 909.28,691.89 U3.W1@943.47,691.89
W2: J1.16 U3.W2 | length 770.8
  Top Layer w6: J1.16@567.14,116.75 890.89,440.5 890.89,640 922.89,672 962.95,672 U3.W2@982.84,691.89
W4: J1.8 U3.W4 | length 930.3
  Top Layer w10: v1(1041.89,672.2) U3.W4@1061.58,691.89
  SIG1 w4: J1.8@369.39,117 924.59,672.2 v1(1041.89,672.2)
W5: J1.21 U3.W5 | length 789.3
  Top Layer w10: v1(1081.26,672.2) U3.W5@1100.95,691.89
  SIG2 w4: J1.21@726.89,57.5 751.89,82.5 751.89,129 1060.77,437.88 1060.77,651.71 v1(1081.26,672.2)
W6: J1.25 U3.W6 | length 780.8
  Top Layer w10: v1(1120.63,672.2) U3.W6@1140.32,691.89
  SIG2 w4: J1.25@826.89,57.5 851.89,82.5 851.89,128 1140.65,416.76 1140.65,652.19 v1(1120.63,672.2)
W7: J1.29 U3.W7 | length 772
  Top Layer w10: U3.W7@1179.69,691.89 v1(1199.38,672.2)
  SIG1 w4: J1.29@926.89,57.5 950.89,81.5 950.89,126 1219.39,394.5 1219.39,652.19 v1(1199.38,672.2)
W9: J1.52 U3.W9 | length 724
  Top Layer w10: v1(1238.74,711.57) U3.W9@1258.43,691.89
  SIG2 w4: v1(1238.74,711.57) 1254.75,695.57 1254.75,349.64 J1.52@1486.39,118
W10: J1.55 U3.W10 | length 750
  Top Layer w10: U3.W10@1297.8,691.89 v1(1317.49,672.2)
  SIG2 w4: v1(1317.49,672.2) 1337.5,652.19 1337.5,341.39 1552.39,126.5 1552.39,82 J1.55@1576.89,57.5
W11: J1.56 U3.W11 | length 674.6
  Top Layer w10: U3.W11@1337.17,691.89 v1(1356.86,672.2)
  SIG2 w4: v1(1356.86,672.2) 1376.87,652.19 1376.87,326.52 J1.56@1583.89,119.5
W12: J1.57 U3.W12 | length 738.1
  Top Layer w10: U3.W12@1376.54,691.89 v1(1396.23,672.2)
  SIG2 w4: v1(1396.23,672.2) 1416.24,652.19 1416.24,310.15 1602.39,124 1602.39,82 J1.57@1626.89,57.5
W14: J1.61 U3.W14 | length 746.9
  Top Layer w10: U3.W14@1455.28,691.89 v1(1474.97,672.2)
  SIG1 w4: v1(1474.97,672.2) 1474.97,351.92 1702.39,124.5 1702.39,82 J1.61@1726.89,57.5
W15: J1.63 U3.W15 | length 751.3
  Top Layer w10: U3.W15@1494.65,691.89 v1(1514.34,672.2)
  SIG1 w4: v1(1514.34,672.2) 1534.35,652.19 1534.35,341.77 1752.39,123.73 1752.39,82 J1.63@1776.89,57.5
W16: J1.76 U3.W16 | length 833.2
  Top Layer w10: U3.W16@1534.02,691.89 v1(1553.71,672.2)
  SIG1 w4: v1(1553.71,672.2) 1573.72,652.19 1573.72,581.67 1999.39,156 2047.39,156 J1.76@2087.39,116
W17: J1.78 U3.W17 | length 841.2
  Top Layer w10: U3.W17@1573.39,691.89 v1(1593.08,672.2)
  SIG1 w4: v1(1593.08,672.2) 1613.09,652.19 1613.09,584.8 2012.39,185.5 2067.39,185.5 J1.78@2136.64,116.25
W20: J2.71 U3.W20 | length 775.4
  Top Layer w6: U3.W20@1691.5,691.89 1711.28,711.67 1803.72,711.67 J2.71@2266.89,248.5
W21: J2.73 U3.W21 | length 739.7
  Top Layer w6: U3.W21@1730.87,691.89 1750.65,672.11 1795.78,672.11 J2.73@2267.14,200.75
W22: J2.74 U3.W22 | length 757.3
  Top Layer w6: U3.W22@1770.24,691.89 1799.5,691.89 2258.89,232.5 2301.89,232.5 J2.74@2326.89,207.5
Y1: J1.15 U3.Y1 | length 746.9
  Top Layer w6: J1.15@576.89,57.5 601.89,82.5 601.89,126 906.89,431 906.89,615.94 U3.Y1@943.47,652.52
Y2: J1.20 U3.Y2 | length 663.9
  Top Layer w6: J1.20@669.39,118.5 963.06,412.17 963.06,632.74 U3.Y2@982.84,652.52
Y3: J1.7 U3.Y3 | length 916.7
  Top Layer w10: v1(1002.52,632.83) U3.Y3@1022.21,652.52
  SIG1 w4: J1.7@376.89,57.5 402.39,83 402.39,125.5 909.72,632.83 v1(1002.52,632.83)
Y4: J1.24 U3.Y4 | length 677.3
  Top Layer w10: U3.Y4@1061.58,652.52 v1(1081.27,632.83)
  SIG1 w4: J1.24@767.64,113.25 1081.27,426.88 v1(1081.27,632.83)
Y6: J1.27 U3.Y6 | length 776.4
  Top Layer w10: U3.Y6@1140.32,652.52 v1(1160.01,672.2)
  SIG1 w4: J1.27@876.89,57.5 902.39,83 902.39,126.5 1180.02,404.13 1180.02,652.19 v1(1160.01,672.2)
Y7: J1.30 U3.Y7 | length 658.2
  Top Layer w10: U3.Y7@1179.69,652.52 v1(1199.38,632.83)
  SIG1 w4: J1.30@918.64,118.75 1199.38,399.49 v1(1199.38,632.83)
Y8: J1.49 U3.Y8 | length 681.1
  Top Layer w10: U3.Y8@1219.06,652.52 v1(1238.75,632.83)
  SIG1 w4: v1(1238.75,632.83) 1266.89,604.69 1266.89,262 1401.89,127 1401.89,82.5 J1.49@1426.89,57.5
Y9: J1.50 U3.Y9 | length 608.9
  Top Layer w10: U3.Y9@1258.43,652.52 v1(1278.12,632.83)
  SIG1 w4: v1(1278.12,632.83) 1278.12,275.27 J1.50@1436.14,117.25
Y11: J1.51 U3.Y11 | length 669.2
  Top Layer w10: v1(1317.48,632.83) U3.Y11@1337.17,652.52
  SIG1 w4: v1(1317.48,632.83) 1317.48,259.41 1452.39,124.5 1452.39,82 J1.51@1476.89,57.5
Y13: J1.58 U3.Y13 | length 643.1
  Top Layer w10: v1(1396.22,632.83) U3.Y13@1415.91,652.52
  SIG1 w4: v1(1396.22,632.83) 1396.22,358.67 J1.58@1637.39,117.5
Y14: J1.59 U3.Y14 | length 720.1
  Top Layer w10: v1(1435.59,632.83) U3.Y14@1455.28,652.52
  SIG1 w4: v1(1435.59,632.83) 1415.1,612.34 1415.1,364.79 1651.89,128 1651.89,82.5 J1.59@1676.89,57.5
Y17: J1.77 U3.Y17 | length 854.2
  Top Layer w10: U3.Y17@1573.39,652.52 v1(1593.08,632.83)
  SIG1 w4: v1(1593.08,632.83) 1593.08,585.31 2007.89,170.5 2058.89,170.5 2101.89,127.5 2101.89,82.5 J1.77@2126.89,57.5
Y18: J2.67 U3.Y18 | length 781.1
  Top Layer w10: U3.Y18@1612.76,652.52 v1(1632.45,632.83)
  SIG1 w4: v1(1632.45,632.83) 1656.78,608.5 2010.39,608.5 J2.67@2268.64,350.25
Y19: J2.68 U3.Y19 | length 797.4
  Top Layer w10: U3.Y19@1652.13,652.52 v1(1671.82,632.83)
  SIG1 w4: v1(1671.82,632.83) 1687.65,617 2023.39,617 ; 2023.39,618 2257.89,383.5 2300.89,383.5 J2.68@2326.89,357.5
Y21: J2.75 U3.Y21 | length 746.9
  Top Layer w6: U3.Y21@1730.87,652.52 1750.65,632.74 1786.15,632.74 J2.75@2269.39,149.5
Y22: J2.76 U3.Y22 | length 761.7
  Top Layer w6: U3.Y22@1770.24,652.52 1789.87,652.52 2259.89,182.5 2301.89,182.5 J2.76@2326.89,157.5
pads on no net: J3.13 J3.14 J3.15 J3.16 J3.17 J3.18 J3.19 J3.20 J3.21 J3.22 J3.23 J3.24 J3.25 J3.26 J3.28 J3.30 J3.32 J4.13 J4.14 J5.2 J5.3 J5.4 U2.J1 U2.J9 U2.L1 U2.L9 U2.M7 U2.T7 U3.A4 U3.A6 U3.B4 U3.B6 U3.C5 U3.C7 U3.C17 U3.D5 U3.D7 U3.D17 U3.E3 U3.E6 U3.E10 U3.E13 U3.E14 U3.E17 U3.F6 U3.F10 U3.F15 U3.F16 U3.F21 U3.G4 U3.G13 U3.G20 U3.L13 U3.M13 U3.M15 U3.N13 U3.P14 U3.P20 U3.R3 U3.R4 U3.T3 U3.U6 U3.U7 U3.U15 U3.V2 U3.V13 U3.Y12 U3.Y16 Y1.1

## Keep-outs
Keep-Out Layer:
  the board outline again, w5

## Silkscreen, mask and mechanical layers (free items; w line width, h text height)
Bottom Overlay:
  text "3.3V" at 1816,1471.5 h60 r45
  text "1.5V" at 781,1447 h60
  text "1.0V" at 1206,1447 h60
  text "1.8V" at 1606,1447 h60
  text "VDDIO" at 1788,1197 h60 r270
  text "3.3" at 2248.89,1095.5 h20
  text "2.5" at 2248.89,1057.5 h20
  text "1.8" at 2245.56,1019.5 h20